# Altium PCB SmartIMU.PcbDoc (part 2 of 2)
Units mil, origin at the board's own origin, x right, y up, seen from the top; angles counter-clockwise.
Board outline 1102.36 x 1187.1 mil, 4 copper layers (Top Layer, Mid-Layer 1, Mid-Layer 2, Bottom Layer), stack 38.583 mil thick; 68 components, 83 nets, 416 pads, 140 vias.
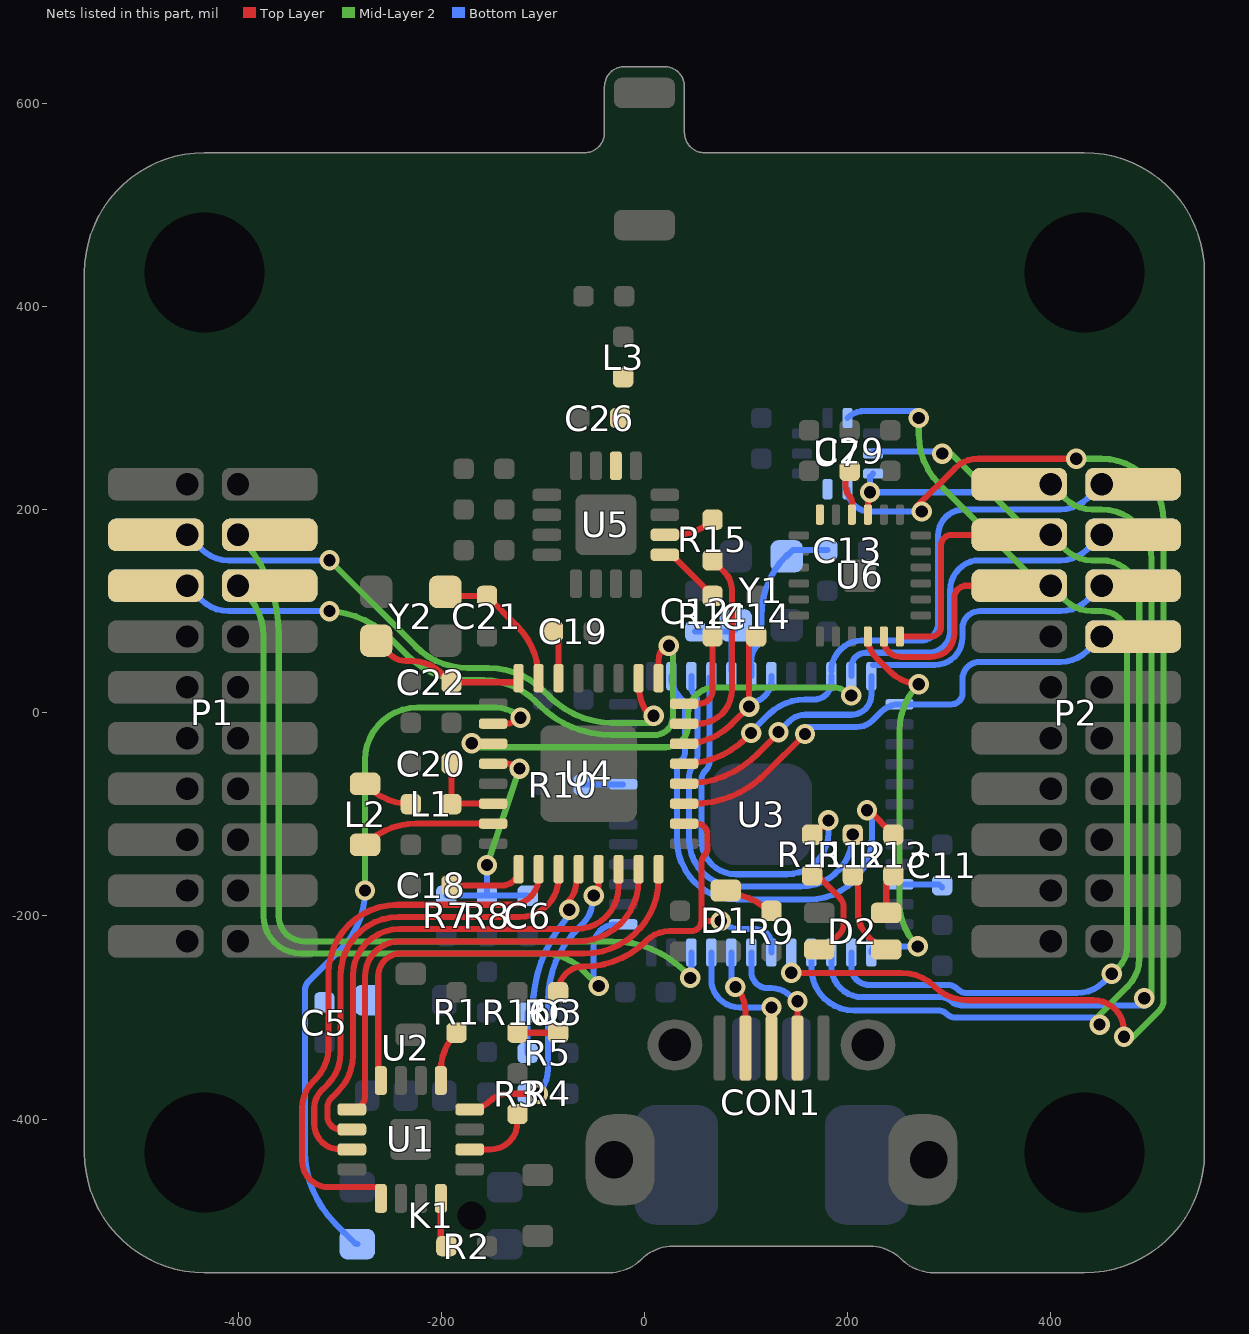
[diagram p4: the nets of this part, all layers, seen from the top]

## Via types
v1: diameter 20, hole 12, Top Layer to Bottom Layer, tented both sides, 131 vias
v2: diameter 24, hole 12, Top Layer to Bottom Layer, tented both sides, 9 vias

## Nets (pads, with @x,y where several pads share a name; then routed paths per layer and width w, separated by ;. In a path a pad name is that pad's centre, name@x,y a point inside that pad or via, vN(x,y) a via of type N, cw(c..) or ccw(c..) an arc to the next point about the centre after c; other vN are vias at no path point) (continued)
IMU_CSB: U3.29 U7.6 | length 1267.6
  Top Layer w6: v1(144.53,-256) 252.91,-256 cw(c252.91,-302.09) 285.5,-269.5 ccw(c318.09,-236.91) 318.09,-283 442,-283 cw(c442,-313) 472,-313 v1(472,-319) ; v1@268,203.04 305.68,240.73 cw(c328.08,218.33) 328.08,250 v1(425,250) ; v1(273,198) v1@273,200.04
  Mid-Layer 2 w6: v1(425,250) 450,250 cw(c450,189) 511,189 511,-282.48 cw(c495.25,-282.48) 506.39,-293.61 v1@476.5,-323.5
  Bottom Layer w6: U7.6@199.84,220 ccw(c221.84,220) 221.84,198 v1(273,198)
IMU_CSM: U3.25 U6.22 | length 393.3
  Top Layer w6: U6.22@219.87,75 219.87,73.96 ccw(c247.8,73.96) 228.05,54.22 241.73,40.54 ccw(c272,70.81) v1@272,28
  Mid-Layer 2 w6: 251,-191.13 251,-17.87 cw(c315.87,-17.87) v1(270,28) v1@269.09,27.09 ; 251.17,-191.13 ccw(c312.46,-186.54) v1(269,-230)
  Bottom Layer w6: U3.25@223.27,-236 cw(c229.27,-236) 229.27,-230 v1@268,-230
IMU_IMTB: U7.7
IMU_INTM: U6.12
IMU_SCK: P2.5 U3.26 U6.23 U7.2 | length 1207.6
  Top Layer w6: U6.23@235.62,75 235.62,71.38 ccw(c252,71.38) 252,55 282,55 ccw(c282,77.99) 304.99,77.99 304.99,112.99 cw(c317,112.99) 317,125 ; 315,125 317,125 ; P2.5@355,125 317,125
  Mid-Layer 2 w6: v1(270,290) 270,273.28 ccw(c338.28,273.28) 290,225 390,125 P2.5@400,125 414,111 ccw(c440.56,137.56) 440.56,100 450,100 cw(c450,75) 475,75 475,-230.67 cw(c447.65,-230.67) 466.99,-250.01 v1(460,-257)
  Bottom Layer w6: U7.2@199.84,290 cw(c216.74,273.1) 216.74,297 v1@270.27,297 ; U3.26@203.58,-236 203.58,-250.22 ccw(c221.36,-250.22) 221.36,-268 298.47,-268 cw(c298.47,-281.66) 308.13,-272 ccw(c317.79,-262.34) 317.79,-276 425.44,-276 ccw(c425.44,-238.44) 452,-265 v1(460,-257)
IMU_SDI: P2.3 U3.28 U6.24 U7.4 | length 1270
  Top Layer w6: U6.24@251.37,75 282,75 ccw(c282,85) 292,85 292,165 cw(c302,165) 302,175 ; 300,175 302,175 ; P2.3@355,175 302,175
  Mid-Layer 2 w6: v1@297,260 P2.3@391,166 ; P2.3@400,175 414,161 ccw(c440.56,187.56) 440.56,150 450,150 cw(c450,113) 487,113 487,-242 cw(c448.37,-242) 475.69,-269.31 v1@443,-302
  Bottom Layer w6: U3.28@164.21,-236 164.21,-251.02 ccw(c206.2,-251.02) 206.2,-293 289.05,-293 cw(c289.05,-304.95) 297.48,-296.48 ccw(c305.97,-288) 305.97,-300 v1@447,-300 ; U7.4@225,257 v1@293,257
  other v1: 448,-307 293,255
IMU_SDO: P2.1 U3.27 U6.9 U7.5 | length 1102.6
  Top Layer w6: U6.9@219.87,195 v1@219.87,214.17
  Mid-Layer 2 w6: P2.1@400,225 414,211 ccw(c440.56,237.56) 440.56,200 450,200 cw(c450,151) 499,151 v1@499,-279
  Bottom Layer w6: U3.27@183.9,-236 183.9,-249.43 ccw(c214.47,-249.43) 214.47,-280 292.34,-280 cw(c292.34,-293.66) 302,-284 ccw(c311.66,-274.34) 311.66,-288 v1@493,-288 ; U7.5@225,235.31 222,232.31 v1(222,217) 369,217 P2.1@369,225 P2.1@370,225
  other v1: 492,-281
KEY: K1.1 U4.26 | length 728.3
  Top Layer w6: U4.26@-149,-10.79 -135.97,-10.79 ccw(c-135.97,8.97) v1(-122,-5)
  Mid-Layer 2 w6: v1(-275,-175) -275,-46.49 cw(c-223.51,-46.49) -223.51,5 -146.14,5 cw(c-146.14,-29.14) v1(-122,-5)
  Bottom Layer w6: K1.1@-282.5,-523 cw(c-282.5,-519.38) -285.05,-521.95 -304.71,-502.29 cw(c-234,-431.58) -334,-431.58 -334,-272.6 cw(c-322.38,-272.6) -330.62,-264.4 -298.89,-232.68 ccw(c-356.57,-175) v1(-275,-175)
LED_B: R11.1 U3.4 | length 363.5
  Top Layer w6: R11.1@165,-120 167,-120 v1(181,-106)
  Bottom Layer w6: U3.4@64,34.79 64,-47.34 cw(c50.34,-47.34) 60,-57 ccw(c69.66,-66.66) 56,-66.66 56,-125 ccw(c90,-125) 90,-159 140,-159 ccw(c140,-118) 181,-118 v1(181,-106)
LED_G: R12.1 U3.3 | length 380.9
  Bottom Layer w6: U3.3@46.1,36 46.1,25.2 ccw(c56.2,25.2) 49.06,18.06 cw(c41.96,10.96) 52,10.96 52,-42.69 cw(c38.34,-42.69) 48,-52.34 ccw(c57.66,-62) 44,-62 44,-125 ccw(c90,-125) 90,-171 145.26,-171 ; 145.59,-171.22 153.78,-171.22 ccw(c153.78,-120) v1(205,-120)
LED_R: R13.1 U3.2 | length 487.8
  Top Layer w6: v1@221,-97 222,-97 R13.1@245,-120
  Bottom Layer w6: U3.2@26.42,36 ccw(c55.98,36) 35.07,15.1 cw(c23.18,3.21) 40,3.21 40,-37.69 cw(c26.34,-37.69) 36,-47.34 ccw(c45.66,-57) 32,-57 32,-125 ccw(c91,-125) 91,-184 161.36,-184 ccw(c161.36,-121.36) 224,-121.36 224,-100 ccw(c221,-100) v1@221,-97
  other v1: 219,-96
LK_AIN: P2.4 U3.11 U4.27 | length 778.2
  Top Layer w6: v1@-170,-30.47 U4.27@-149,-30.47
  Mid-Layer 2 w6: v1@-170,-34 21,-34 ccw(c21,-12) 43,-12 43,-1.49 cw(c69.49,-1.49) 69.49,25 184.27,25 cw(c184.27,-2.31) v1(203.58,17) 204,16.58 v1@204,15
  Bottom Layer w6: U3.11@203.58,36 203.58,44.64 cw(c217.94,44.64) 217.94,59 279.06,59 ccw(c279.06,80.94) 301,80.94 301,121 cw(c330,121) 330,150 409.44,150 ccw(c409.44,187.56) 436,161 P2.4@450,175
  other v1: -170,-30
LK_FLOW: P2.2 U3.10 U4.13 | length 581.1
  Top Layer w6: U4.13@39,-50.16 ccw(c39,36.37) 100.19,-24.81 v1(105,-20)
  Bottom Layer w6: v1@105.71,-18.29 122.29,-1.71 cw(c157.81,-37.24) 157.81,13 167,13 ccw(c167,29.9) 183.9,29.9 U3.10@183.9,36 ; U3.10@183.9,41 cw(c212.95,41) 191.89,61.01 193.83,62.94 cw(c213.32,43.4) 213.32,71 271,71 ; 272,71 ccw(c272,88) 289,88 289,174.42 cw(c314.58,174.42) 314.58,200 409.44,200 ccw(c409.44,237.56) 436,211 P2.2@450,225
LK_STATE: D3.1 U3.30 U4.10 | length 373.1
  Top Layer w6: D3.1@-85,-275 cw(c-59.73,-275) -59.73,-249.73 ; -59,-249.73 ccw(c-59,-163.95) 1.66,-224.61 cw(c24.86,-247.81) 24.86,-215 46,-215 ccw(c46,-205) 56,-205 ; U4.10@39,-109.21 51.21,-109.21 cw(c51.21,-120) 62,-120 62,-133.25 cw(c51.76,-133.25) 59.01,-140.48 ccw(c66.24,-147.74) 56,-147.74 56,-205 ; v1(75,-205) 56,-205
  Bottom Layer w6: v1(75,-205) ccw(c94.31,-185.69) 94.31,-213 110,-213 cw(c110,-227.84) 124.84,-227.84 U3.30@124.84,-236
LK_URX: P2.6 U3.12 U4.12 | length 505
  Top Layer w6: U4.12@39,-69.84 40.74,-69.84 ccw(c40.74,30.16) 111.45,-40.55 131.17,-20.83 ccw(c129.46,-19.12) v1(131.88,-19.12)
  Bottom Layer w6: v1(131.88,-19.12) 142.64,-8.36 cw(c158,-23.73) 158,-2 203.65,-2 ccw(c203.65,17.62) 223.27,17.62 U3.12@223.27,36 ; U3.12@225,47 285.78,47 ccw(c285.78,74.22) 313,74.22 313,83.07 cw(c329.93,83.07) 329.93,100 409.44,100 ccw(c409.44,137.56) 436,111 P2.6@450,125
LK_UTX: P2.8 U3.13 U4.11 | length 480.8
  Top Layer w6: U4.11@39,-89.53 48.05,-89.53 ccw(c48.05,10.47) 101.46,-74.07 ccw(c48.05,10.47) 118.76,-60.24 v1(158,-21)
  Bottom Layer w6: v1@158,-14 209,-14 ccw(c209,8.09) 224.63,-7.53 232.94,0.79 cw(c251,-17.27) U3.13@251,8.27 302.11,8.27 ccw(c302.11,19.16) 313,19.16 313,33.07 cw(c329.93,33.07) 329.93,50 409.44,50 ccw(c409.44,87.56) 436,61 P2.8@450,75
NetC5_2: C5.2 U2.4
NetC18_2: C18.2 U4.1 | length 75.2
  Top Layer w6: C18.2@-190,-170 -139.9,-170 ccw(c-139.9,-154) U4.1@-123.9,-154
NetC19_2: C19.2 U4.22 | length 47.5
  Top Layer w6: C19.2@-90,80 cw(c-103.21,66.79) -84.53,66.79 U4.22@-84.53,34
NetC20_1: C20.1 L1.1 U4.30 | length 79.4
  Top Layer w6: L1.1@-190,-89.53 C20.1@-190,-50 ; L1.1@-188.86,-89.53 U4.30@-149,-89.53
NetC26_2: C26.2 L3.1 U5.10
NetD1_1: D1.1 R9.1 | length 47.4
  Top Layer w6: D1.1@80,-178 cw(c80,-238.35) R9.1@122.68,-195.68
NetD2_1: D2.1 R13.2 | length 41
  Top Layer w6: D2.1@238,-197 238,-167 cw(c245,-167) R13.2@245,-160
NetD2_2: D2.2 R12.2 | length 91.6
  Top Layer w6: R12.2@208.02,-163.02 ccw(c205,-163.02) R12.2@205,-160 cw(c192.93,-172.07) 210,-172.07 210,-196 ccw(c243.8,-196) 219.9,-219.9 229.46,-229.46 ccw(c238,-220.93) D2.2@238,-233
NetD2_3: D2.3 R11.2 | length 94.9
  Top Layer w6: R11.2@165,-160 cw(c165,-172.07) 173.54,-163.54 192,-182 cw(c182.34,-191.66) 196,-191.66 196,-208 cw(c181.51,-208) 191.77,-218.23 D2.3@177,-233
NetD3_2: D3.2 R16.2 | length 40
  Top Layer w6: R16.2@-125,-315 D3.2@-85,-315
NetL1_2: L1.2 L2.1 | length 50.7
  Top Layer w6: L2.1@-275,-70 -272.67,-72.33 ccw(c-230,-29.64) L1.2@-230,-90
NetL2_2: L2.2 U4.31 | length 131.6
  Top Layer w6: L2.2@-275,-130 -274.87,-129.87 cw(c-225,-179.74) -225,-109.21 U4.31@-149,-109.21
NetR14_2: R14.2 U5.5 | length 63.1
  Top Layer w6: U5.5@20,155.47 cw(c20,139.71) 31.14,150.86 R14.2@67,115
NetR15_2: R15.2 U5.6 | length 51
  Top Layer w6: U5.6@20,175.16 31.17,175.16 ccw(c31.17,225.83) R15.2@67,190
NRF_SWCLK: P1.5 U4.17 | length 641.5
  Top Layer w6: U4.17@13.9,34 13.9,51.27 cw(c34.73,51.27) v1@20,66
  Mid-Layer 2 w6: v1@-314,100 cw(c-314,10.68) -250.84,73.84 -233,56 ccw(c-175.06,113.94) -175.06,32 -158,32 cw(c-158,-40.43) -106.79,10.79 -103.29,7.29 ccw(c-32.58,78) -32.58,-22 10,-22 ccw(c10,-4) 28,-4 28,56.34 ccw(c14.34,56.34) v1(24,66)
  Bottom Layer w6: P1.5@-450,125 -436,111 ccw(c-409.44,137.56) -409.44,100 v1(-310,100)
NRF_SWDIO: P1.3 U4.18 | length 569.8
  Top Layer w6: U4.18@-5.79,34 -5.79,27.7 ccw(c44.7,27.7) v1@9,-8
  Mid-Layer 2 w6: v1(-310,150) -225.21,65.21 ccw(c-174,116.43) -174,44 -153.37,44 cw(c-153.37,-32.21) -99.48,21.68 -93.8,16 ccw(c-31.03,78.77) -31.03,-10 v1@9,-10
  Bottom Layer w6: P1.3@-450,175 -436,161 ccw(c-409.44,187.56) -409.44,150 v1(-310,150)
  other v1: 9,-3
NRF_XC1: C21.2 U4.23 Y2.1 | length 141.6
  Top Layer w6: Y2.1@-196,119 -192,115 C21.2@-155,115 -125.58,85.58 cw(c-177.15,34) U4.23@-104.21,34
NRF_XC2: C22.2 U4.24 Y2.3 | length 155.9
  Top Layer w6: Y2.3@-264,71 -250.36,57.36 ccw(c-235,72.73) -235,51 -228.97,51 cw(c-228.97,10.03) -200,39 -191.71,30.71 ccw(c-190,32.41) C22.2@-190,30 -127.9,30 U4.24@-123.9,34
PA_RXEN: R15.1 U4.15 | length 186.7
  Top Layer w6: U4.15@52.65,-10.79 ccw(c52.65,22.56) 86,22.56 86,121.1 ccw(c62.1,121.1) 79,138 R15.1@67,150
PA_TXEN: R14.1 U4.16 | length 88.5
  Top Layer w6: U4.16@39,8.9 53.96,8.9 ccw(c53.96,21.94) 67,21.94 R14.1@67,75
PM_AVBAT: C6.2 R7.1 R8.2 U4.28 | length 241.4
  Top Layer w6: U4.28@-149,-50.16 -134.69,-50.16 cw(c-134.69,-66.69) v1(-123,-55)
  Mid-Layer 2 w6: v1@-152.29,-147.29 v1(-155,-150) v1(-123,-55)
  Bottom Layer w6: R7.1@-195,-180 R8.2@-155,-180 ; v1(-155,-150) R8.2@-155,-180 ; C6.2@-115,-180 R8.2@-155,-180
PM_AVBUS: R5.1 R6.2 U4.4 | length 192.4
  Top Layer w6: v1@-76,-187 ccw(c-98.11,-164.89) -66.84,-164.89 U4.4@-66.84,-147
  Bottom Layer w6: R5.1@-115,-335 R6.2@-115,-295 ; R6.2@-110,-292.98 cw(c29.98,-292.98) v1@-69,-194
  other v1: -74,-194
PM_CHG: U1.9 U4.2 | length 552.1
  Top Layer w6: U1.9@-260,-467 -310.78,-467 cw(c-310.78,-440.78) -337,-440.78 -337,-389 cw(c-300.79,-389) -326.39,-363.39 -324,-361 ccw(c-355.38,-329.62) -311,-329.62 -311,-256.98 cw(c-243.02,-256.98) -243.02,-189 -131.05,-189 ccw(c-131.05,-162.16) -104.21,-162.16 U4.2@-104.21,-154
PM_CHG_EN: U1.4 U4.8 | length 443
  Top Layer w6: U1.4@-262,-363 -262,-259.17 cw(c-239.83,-259.17) -239.83,-237 -69.1,-237 ; -68.11,-237 -59.26,-237 ccw(c-59.26,-163.84) 13.9,-163.84 U4.8@13.9,-154
PM_EN1: U1.6 U4.6 | length 506.2
  Top Layer w6: U1.6@-288,-410.16 -299.39,-410.16 cw(c-299.39,-397.55) -312,-397.55 -312,-389.01 cw(c-297.49,-389.01) -307.76,-378.76 -301.43,-372.42 ccw(c-336.39,-337.53) -287,-337.53 -287,-258.96 cw(c-241.04,-258.96) -241.04,-213 -67.34,-213 ccw(c-67.34,-171.13) -25.47,-171.13 U4.6@-25.47,-154
PM_EN2: U1.5 U4.7 | length 472.6
  Top Layer w6: U1.5@-288,-390.47 ccw(c-288,-377.47) -275,-377.47 -275,-259.42 cw(c-240.58,-259.42) -240.58,-225 -65.8,-225 ccw(c-65.8,-164.99) -5.79,-164.99 U4.7@-5.79,-154
PM_ILIM: R2.2 U1.12 | length 49.3
  Top Layer w6: U1.12@-200.47,-478 -200.47,-519.53 R2.2@-195,-525
PM_ISENS: R4.2 U1.16 U4.5 | length 302.5
  Top Layer w6: U1.16@-172,-390.47 ccw(c-172,-362.64) -152.32,-382.32 cw(c-134.65,-400) -134.65,-375 v1(-105,-375) ; v1@-46,-179 ccw(c-48.03,-176.97) -45.16,-176.97 U4.5@-45.16,-154
  Bottom Layer w6: v1(-105,-375) ccw(c-129.14,-350.86) -95,-350.86 -95,-283.42 cw(c5,-283.42) -65.71,-212.71 -60.89,-207.89 ccw(c-84.8,-184) v1@-51,-184
  other v1: -50,-180
PM_PGOOD: U1.7 U4.3 | length 483.3
  Top Layer w6: U1.7@-288,-429.84 -299.66,-429.84 cw(c-299.66,-404.5) -325,-404.5 -325,-389 cw(c-300.86,-389) -317.93,-371.93 -312,-366 ccw(c-343.38,-334.62) -299,-334.62 -299,-258.17 cw(c-241.83,-258.17) -241.83,-201 -122.89,-201 ccw(c-122.89,-162.64) -84.53,-162.64 U4.3@-84.53,-154
PM_TMR: R3.2 U1.14 | length 70.4
  Top Layer w6: U1.14@-172,-429.84 -151.71,-429.84 ccw(c-151.71,-403.13) -125,-403.13 R3.2@-125,-395
PM_TS: R1.2 U1.1 | length 51.1
  Top Layer w6: U1.1@-200.47,-362 -200.47,-352.35 cw(c-147.65,-352.35) R1.2@-185,-315
REG: C29.2 U6.10 | length 45.3
  Top Layer w6: 198,222.66 ccw(c211.66,222.66) 202,213 cw(c196.87,207.87) 204.13,207.87 U6.10@204.13,195 ; 198,223.66 198,234 C29.2@202,238
STM_BOOT: R10.2 U3.44 | length 39.1
  Bottom Layer w6: R10.2@-60,-71 cw(c-58.73,-72.27) -58.73,-70.47 U3.44@-21,-70.47
STM_RST: C14.2 U3.7 U4.14 | length 191.7
  Top Layer w6: U4.14@39,-30.47 ccw(c39,35.99) 85.99,-11.01 v1(103,6) 103,68 cw(c110,68) C14.2@110,75
  Bottom Layer w6: v1@103,10 ccw(c103,31.84) U3.7@124.84,31.84 ; U3.7@124.84,27.84 U3.7@124.84,36
STM_SWCLK: P1.6 U3.37 | length 770
  Mid-Layer 2 w6: P1.6@-400,125 -392.68,117.68 cw(c-435.35,75) -375,75 -375,-200 ccw(c-338,-200) -338,-237 -100,-237 cw(c-100,-292.53) -60.74,-253.26 v1(-45,-269)
  Bottom Layer w6: v1(-45,-269) -50,-264 -50,-230 cw(c-28.27,-230) U3.37@-28.27,-208.27
STM_SWDIO: P1.4 U3.34 | length 842.3
  Mid-Layer 2 w6: P1.4@-400,175 cw(c-496.57,78.43) -360,78.43 -360,-200 ccw(c-335,-200) -335,-225 -31.32,-225 cw(c-31.32,-325) 39.39,-254.29 v1@45.1,-260
  Bottom Layer w6: v1@46.1,-263 U3.34@46.1,-236
  other v1: 45.1,-261
STM_VCAP: C11.2 U3.22 | length 43.3
  Bottom Layer w6: U3.22@251,-168.9 289.9,-168.9 C11.2@293,-172
STM_XT1: C12.2 U3.5 Y1.1 | length 83.4
  Bottom Layer w6: C12.2@50,80 85,80 ccw(c85,86) Y1.1@85.47,80.02 ; U3.5@85.47,41 Y1.1@85.47,80.02 ; Y1.1@91,86 cw(c85,86) Y1.1@85.47,80.02
STM_XT2: C13.2 U3.6 Y1.3 | length 165.8
  Bottom Layer w6: U3.6@105.16,36 U3.6@105.16,46.89 ; 105.16,51.89 cw(c125.11,51.89) 111,66 ccw(c101.34,75.66) 115,75.66 115,94.64 cw(c200.35,94.64) Y1.3@140,155 ; Y1.3@140,154 146,160 C13.2@180,160
USB_DM: CON1.2 U3.32 | length 97.7
  Top Layer w6: v1(89.47,-270) cw(c65.48,-293.99) 99.41,-293.99 CON1.2@99.41,-330
  Bottom Layer w6: v1@85.47,-271 U3.32@85.47,-236
USB_DP: CON1.3 U3.33 | length 141.3
  Top Layer w6: CON1.3@125,-330 v1(125,-290)
  Bottom Layer w6: U3.33@65.79,-236 65.79,-262.32 ccw(c93.46,-262.32) 93.46,-290 v1(125,-290)
USB_ID: CON1.4 U3.31 | length 124.6
  Top Layer w6: CON1.4@150.59,-330 v1(150.59,-284)
  Bottom Layer w6: U3.31@105.16,-236 105.16,-254.85 ccw(c121.31,-254.85) 121.31,-271 125,-271 cw(c125,-296.57) 143.08,-278.49 v1@150.59,-286
pads on no net: A1.2 CON1.0 CON2.0 K1.3 K1.NC U4.21 U5.13 U6.2 U6.3 U6.4 U6.5 U6.6 U6.14 U6.15 U6.16 U6.17 U6.19

## Polygon pours and split planes (outlines as drawn)
GND on Mid-Layer 1 "GND_L02_P001" (solid, remove dead copper, pour order 1): -551.18,-433.07 ccw(c-433.07,-433.07) -433.07,-551.18 -34.69,-551.18 ccw(c-34.69,-506.49) -3.09,-538.09 cw(c28.51,-569.69) 28.51,-525 221.49,-525 cw(c221.49,-569.69) 253.09,-538.09 ccw(c284.69,-506.49) 284.69,-551.18 433.07,-551.18 ccw(c433.07,-433.07) 551.18,-433.07 551.18,433.07 ccw(c433.07,433.07) 433.07,551.18 59.06,551.18 cw(c59.06,570.87) 39.37,570.87 39.37,616.24 ccw(c19.69,616.24) 19.69,635.92 -19.69,635.92 ccw(c-19.69,616.24) -39.37,616.24 -39.37,570.87 cw(c-59.06,570.87) -59.06,551.18 -433.07,551.18 ccw(c-433.07,433.07) -551.18,433.07
+3V3 on Mid-Layer 2 "+3V3_L03_P000" (solid, remove dead copper, pour order 0): -551.18,-433.07 ccw(c-433.07,-433.07) -433.07,-551.18 -34.69,-551.18 ccw(c-34.69,-506.49) -3.09,-538.09 cw(c28.51,-569.69) 28.51,-525 221.49,-525 cw(c221.49,-569.69) 253.09,-538.09 ccw(c284.69,-506.49) 284.69,-551.18 433.07,-551.18 ccw(c433.07,-433.07) 551.18,-433.07 551.18,433.07 ccw(c433.07,433.07) 433.07,551.18 59.06,551.18 cw(c59.06,570.87) 39.37,570.87 39.37,616.24 ccw(c19.69,616.24) 19.69,635.92 -19.69,635.92 ccw(c-19.69,616.24) -39.37,616.24 -39.37,570.87 cw(c-59.06,570.87) -59.06,551.18 -433.07,551.18 ccw(c-433.07,433.07) -551.18,433.07
GND on Bottom Layer "GND_L04_P002" (solid, remove dead copper, pour order 2): -551.18,-433.07 ccw(c-433.07,-433.07) -433.07,-551.18 -34.69,-551.18 ccw(c-34.69,-506.49) -3.09,-538.09 cw(c28.51,-569.69) 28.51,-525 221.49,-525 cw(c221.49,-569.69) 253.09,-538.09 ccw(c284.69,-506.49) 284.69,-551.18 433.07,-551.18 ccw(c433.07,-433.07) 551.18,-433.07 551.18,433.07 ccw(c433.07,433.07) 433.07,551.18 59.06,551.18 cw(c59.06,570.87) 39.37,570.87 39.37,616.24 ccw(c19.69,616.24) 19.69,635.92 -19.69,635.92 ccw(c-19.69,616.24) -39.37,616.24 -39.37,570.87 cw(c-59.06,570.87) -59.06,551.18 -433.07,551.18 ccw(c-433.07,433.07) -551.18,433.07
GND on Top Layer "GND_L01_P004" (solid, remove dead copper, pour order 4): -551.18,-433.07 ccw(c-433.07,-433.07) -433.07,-551.18 -34.69,-551.18 ccw(c-34.69,-506.49) -3.09,-538.09 cw(c28.51,-569.69) 28.51,-525 221.49,-525 cw(c221.49,-569.69) 253.09,-538.09 ccw(c284.69,-506.49) 284.69,-551.18 433.07,-551.18 ccw(c433.07,-433.07) 551.18,-433.07 551.18,433.07 ccw(c433.07,433.07) 433.07,551.18 59.06,551.18 cw(c59.06,570.87) 39.37,570.87 39.37,616.24 ccw(c19.69,616.24) 19.69,635.92 -19.69,635.92 ccw(c-19.69,616.24) -39.37,616.24 -39.37,570.87 cw(c-59.06,570.87) -59.06,551.18 -433.07,551.18 ccw(c-433.07,433.07) -551.18,433.07

## Other copper
Top Layer:
  pour cut-out: 3,433.07 -43,433.07 -43,250 3,250
  region net +VBAT: -238,-294 ccw(c-238,-302) -246,-302 -246,-375 ccw(c-244,-375) -244,-377 -235,-377 ccw(c-235,-375) -233,-375 -233,-348 cw(c-231,-348) -231,-346 -229,-346 cw(c-229,-348) -227,-348 -227,-375 ccw(c-225,-375) -225,-377 -216,-377 ccw(c-216,-375) -214,-375 -214,-302 ccw(c-222,-302) -222,-294
  region net +VBUS: -85,-349 -85,-423 cw(c-105,-423) -105,-443 -184,-443 ccw(c-184,-446) -187,-446 -187,-463 ccw(c-184,-463) -184,-466 -74,-466 ccw(c-74,-456) -64,-456 -64,-421 cw(c-32,-421) -32,-389 70,-389 ccw(c70,-379) 80,-379 80,-300 ccw(c77,-300) 77,-297 70,-297 ccw(c70,-300) 67,-300 67,-348 cw(c57,-348) 57,-358 -53.49,-358 cw(c-52.99,-345.5) -65,-349
  region net +VIN: -222,-546 ccw(c-222,-538) -214,-538 -214,-465 ccw(c-216,-465) -216,-463 -225,-463 ccw(c-225,-465) -227,-465 -227,-492 cw(c-229,-492) -229,-494 -231,-494 cw(c-231,-492) -233,-492 -233,-465 ccw(c-235,-465) -235,-463 -244,-463 ccw(c-244,-465) -246,-465 -246,-538 ccw(c-238,-538) -238,-546
  region net ANT_PA: -27,495 ccw(c-27,488) -34,488 -34,365 ccw(c-29,365) -29,360 -11,360 ccw(c-11,365) -6,365 -6,458 cw(c1,458) 1,465 23,465 ccw(c23,472) 30,472 30,488 ccw(c23,488) 23,495
  region net NetC26_2: -6.16,286.73 cw(c-36.89,286.73) -15.16,265 ccw(c1.74,248.1) -22.16,248.1 -22.16,243 -34.16,243 -34.16,334.84 cw(c-29,334.84) -29,340 -11,340 cw(c-11,335) -6,335
  region net ANT: -14.47,127 -14.47,121.9 cw(c-38.37,121.9) -21.47,105 ccw(c0.26,83.27) -30.47,83.27 -30.47,34 -20.47,34 -20.47,35.27 cw(c10.26,35.27) -11.47,57 ccw(c-33.2,78.73) -2.47,78.73 -2.47,127
Mid-Layer 1:
  region net GND: -255,-405 -225,-405 -225,-435 -255,-435
  region net GND: 130,-85 130,-115 100,-115
  pour cut-out: -45,433.07 -45,250 -50,245 -93,245 -98,240 -98,130 -93,125 -46,125 -41,120 -41,20 -36,15 4,15 9,20 9,120 14,125 17,125 22,130 22,240 17,245 10,245 5,250 5,433.07
Mid-Layer 2:
  region net +VBUS: -462,-158 -443,-158 -434,-167 -434,-183 -443,-192 -472,-192 -481,-201 -481,-321 -456,-346 -223,-346 -216,-339 -75,-339 -75,-359 -208,-359 -215,-366 -464.29,-366 -501,-329.29 -501,-184 -475,-158
  region net +VBAT: -434,-218 -443,-209 -459,-209 -468,-218 -468,-312.16 -447.16,-333 -56.63,-333 11.37,-401 156,-401 165,-392 165,-378 156,-369 24.63,-369 -45.37,-299 -434.07,-299
  pour cut-out: -45,433.07 -45,250 -50,245 -93,245 -98,240 -98,130 -93,125 -46,125 -41,120 -41,20 -36,15 4,15 9,20 9,120 14,125 17,125 22,130 22,240 17,245 10,245 5,250 5,433.07
Bottom Layer:
  region net +3V3: -155,-272 -181.17,-272 cw(c-181.17,-265.17) -186,-270 ccw(c-190.83,-274.83) -190.83,-268 -203,-268 ccw(c-203,-274) -209,-274 -209,-299 ccw(c-203,-299) -203,-305 -150,-305 ccw(c-150,-300) -145,-300 -145,-282 -155,-282
  region net +VBUS: -85,-349 -65,-349 -65,-330 ccw(c-70,-330) -70,-325 -80,-325 ccw(c-80,-330) -85,-330
  region net +VBAT: 135,-305 135,-332.72 cw(c78.72,-332.72) 118.51,-372.51 ccw(c127,-381) 115,-381 115,-389 ccw(c127,-389) 127,-401 153,-401 ccw(c153,-389) 165,-389 165,-305 ccw(c160,-305) 160,-300 140,-300 ccw(c140,-305)
  region net GND: -120,-397 ccw(c-126,-397) -126,-391 -173,-391 ccw(c-173,-397) -179,-397 -179,-474 cw(c-188,-474) -188,-483 -202,-483 ccw(c-202,-489) -208,-489 -208,-540 ccw(c-202,-540) -202,-546 -126,-546 ccw(c-126,-540) -120,-540 -120,-494 ccw(c-126,-494) -126,-488 -149,-488 cw(c-149,-476) -161,-476 -161,-458 cw(c-149,-458) -149,-446 -126,-446 ccw(c-126,-440) -120,-440
  region net +VIN: -279,-350 ccw(c-279,-356) -285,-356 -285,-386 ccw(c-279,-386) -279,-392 -267,-392 ccw(c-267,-386) -261,-386 -261,-366 cw(c-251,-366) -251,-356 -219,-356 cw(c-219,-366) -209,-366 -209,-442 cw(c-219,-442) -219,-452 -240,-452 ccw(c-240,-458) -246,-458 -246,-539 ccw(c-239,-539) -239,-546 -221,-546 ccw(c-221,-539) -214,-539 -214,-483 cw(c-208,-483) -208,-477 -191,-477 ccw(c-191,-471) -185,-471 -185,-391 cw(c-179,-391) -179,-385 -151,-385 ccw(c-151,-379) -145,-379 -145,-356 ccw(c-151,-356) -151,-350
  region net GND: -249,-362 ccw(c-249,-368) -255,-368 -255,-388 cw(c-265,-388) -265,-398 -279,-398 ccw(c-279,-404) -285,-404 -285,-440 ccw(c-279,-440) -279,-446 -221,-446 ccw(c-221,-440) -215,-440 -215,-368 ccw(c-221,-368) -221,-362
  region net NetC5_2: -319,-268 ccw(c-319,-274) -325,-274 -325,-292 ccw(c-319,-292) -319,-298 -267,-298 ccw(c-267,-292) -261,-292 -261,-274 ccw(c-267,-274) -267,-268
Multi-Layer:
  pour cut-out: -433.07,551.18 ccw(c-433.07,433.07) -551.18,433.07 551.18,433.07 ccw(c433.07,433.07) 433.07,551.18 59.06,551.18 cw(c59.05,570.87) 39.37,570.87 39.37,616.24 ccw(c19.69,616.24) 19.69,635.92 -19.69,635.92 ccw(c-19.69,616.24) -39.37,616.24 -39.37,570.87 cw(c-59.05,570.86) -59.14,551.18

## Silkscreen, mask and mechanical layers (free items; w line width, h text height)
Top Overlay:
  circle w16: c-290,225 r8
  circle w10: c105,-110 r30
  circle w16: c-155,320 r4
  region: -300,-25 -280,-45 -280,-5
  region: -280,25 -300,45 -300,5
  lines w6: -300,-25 -280,-5 -280,-45 -300,-25 ; -300,5 -300,45 -280,25 -300,5
  lines w8: 83.79,-131.21 105,-110 ; 83.79,-88.79 105,-110 ; 126.21,-131.21 105,-110 ; 126.21,-88.79 105,-110
  lines w10: 80,-50 105,-25 ; 105,-80 105,-25 ; 130,-50 105,-25
  lines w15: -250,320 cw(c-155,320) -155,415 ; -220,320 cw(c-155,320) -155,385 ; -190,320 cw(c-155,320) -155,355
  text "KitSprout" at 15,368.73 h85
  text "SmartIMU" at 15,315.16 h65
  text "v2.0" at 265,315 h55
  text "X" at 70,-15 h100
Bottom Overlay:
  drawing of 3467 lines, arcs and shapes, not listed
  text "X" at 160,460 h100
  text "Y" at 280,335 h100
  text "+" at 195,-305 h85
Mechanical 1:
  lines w2: -34.69,-551.18 -433.07,-551.18 cw(c-433.07,-433.07) -551.18,-433.07 -551.18,433.07 cw(c-433.07,433.07) -433.07,551.18 -59.06,551.18 ccw(c-59.06,570.87) -39.37,570.87 -39.37,616.24 cw(c-19.69,616.24) -19.69,635.92 19.69,635.92 cw(c19.69,616.24) 39.37,616.24 39.37,570.87 ccw(c59.06,570.87) 59.06,551.18 433.07,551.18 cw(c433.07,433.07) 551.18,433.07 551.18,-433.07 cw(c433.07,-433.07) 433.07,-551.18 284.69,-551.18 ; -780,-699.09 ccw(c-780,-699.09) -780,-699.09
  lines w2.01: -34.69,-551.18 ccw(c-34.69,-506.49) -3.09,-538.09 cw(c28.51,-569.69) 28.51,-525 221.49,-525 cw(c221.49,-569.69) 253.09,-538.09 ccw(c284.69,-506.49) 284.69,-551.18
Mechanical 2:
  circle w2: c-433.07,433.07 r130
  circle w2: c-433.07,433.07 r59.06
  circle w2: c433.07,433.07 r130
  circle w2: c433.07,433.07 r59.06
  circle w2: c-433.07,-433.07 r130
  circle w2: c-433.07,-433.07 r59.06
  circle w2: c433.07,-433.07 r130
  circle w2: c433.07,-433.07 r59.06
  lines w2: -452.76,-433.07 -413.39,-433.07 ; -452.76,433.07 -413.39,433.07 ; -433.07,-452.76 -433.07,-413.39 ; -433.07,413.39 -433.07,452.76 ; -55,0 55,0 ; -34.69,-551.18 -433.07,-551.18 cw(c-433.07,-433.07) -551.18,-433.07 -551.18,433.07 cw(c-433.07,433.07) -433.07,551.18 -59.06,551.18 ccw(c-59.06,570.87) -39.37,570.87 -39.37,616.24 cw(c-19.69,616.24) -19.69,635.92 19.69,635.92 cw(c19.69,616.24) 39.37,616.24 39.37,570.87 ccw(c59.06,570.87) 59.06,551.18 433.07,551.18 cw(c433.07,433.07) 551.18,433.07 551.18,-433.07 cw(c433.07,-433.07) 433.07,-551.18 284.69,-551.18 ; 0,-55 0,55 ; 413.39,-433.07 452.76,-433.07 ; 413.39,433.07 452.76,433.07 ; 433.07,-452.76 433.07,-413.39 ; 433.07,413.39 433.07,452.76 ; -1000,-1000 -1000,0 -1000,1000 0,1000 1000,1000 1000,0 1000,-1000 0,-1000 -1000,-1000
  lines w2.01: -34.69,-551.18 ccw(c-34.69,-506.49) -3.09,-538.09 cw(c28.51,-569.69) 28.51,-525 221.49,-525 cw(c221.49,-569.69) 253.09,-538.09 ccw(c284.69,-506.49) 284.69,-551.18

## Dimensions
433.07,551.18 to 19.69,635.92 on Mechanical 2
-433.07,551.18 to -433.07,-551.18 on Mechanical 2
-433.07,433.07 to -433.07,-433.07 on Mechanical 2
551.18,433.07 to 0,635.92 on Mechanical 2
433.07,433.07 to -433.07,433.07 on Mechanical 2
551.18,433.07 to -551.18,433.07 on Mechanical 2